# Altium PCB Clock_Led7_23.PcbDoc
Units mm, origin at the board's own origin, x right, y up, seen from the top; angles counter-clockwise.
Board outline 205.75 x 97.75 mm, 2 copper layers (Top Layer, Bottom Layer); 65 components, 51 nets, 252 pads, 68 vias.
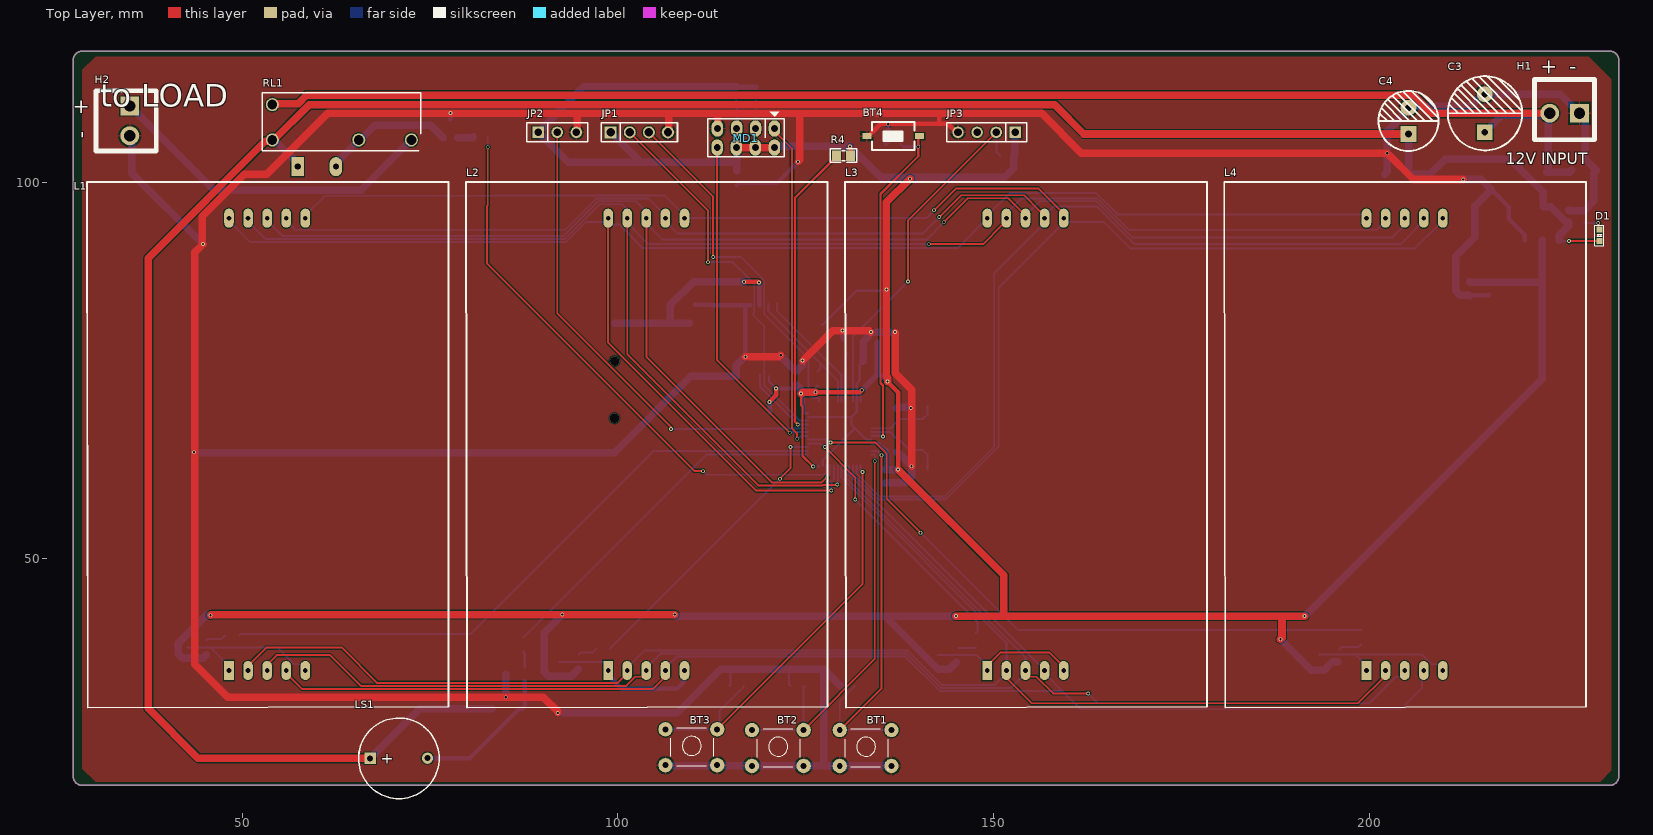
[diagram p0: Top Layer view]
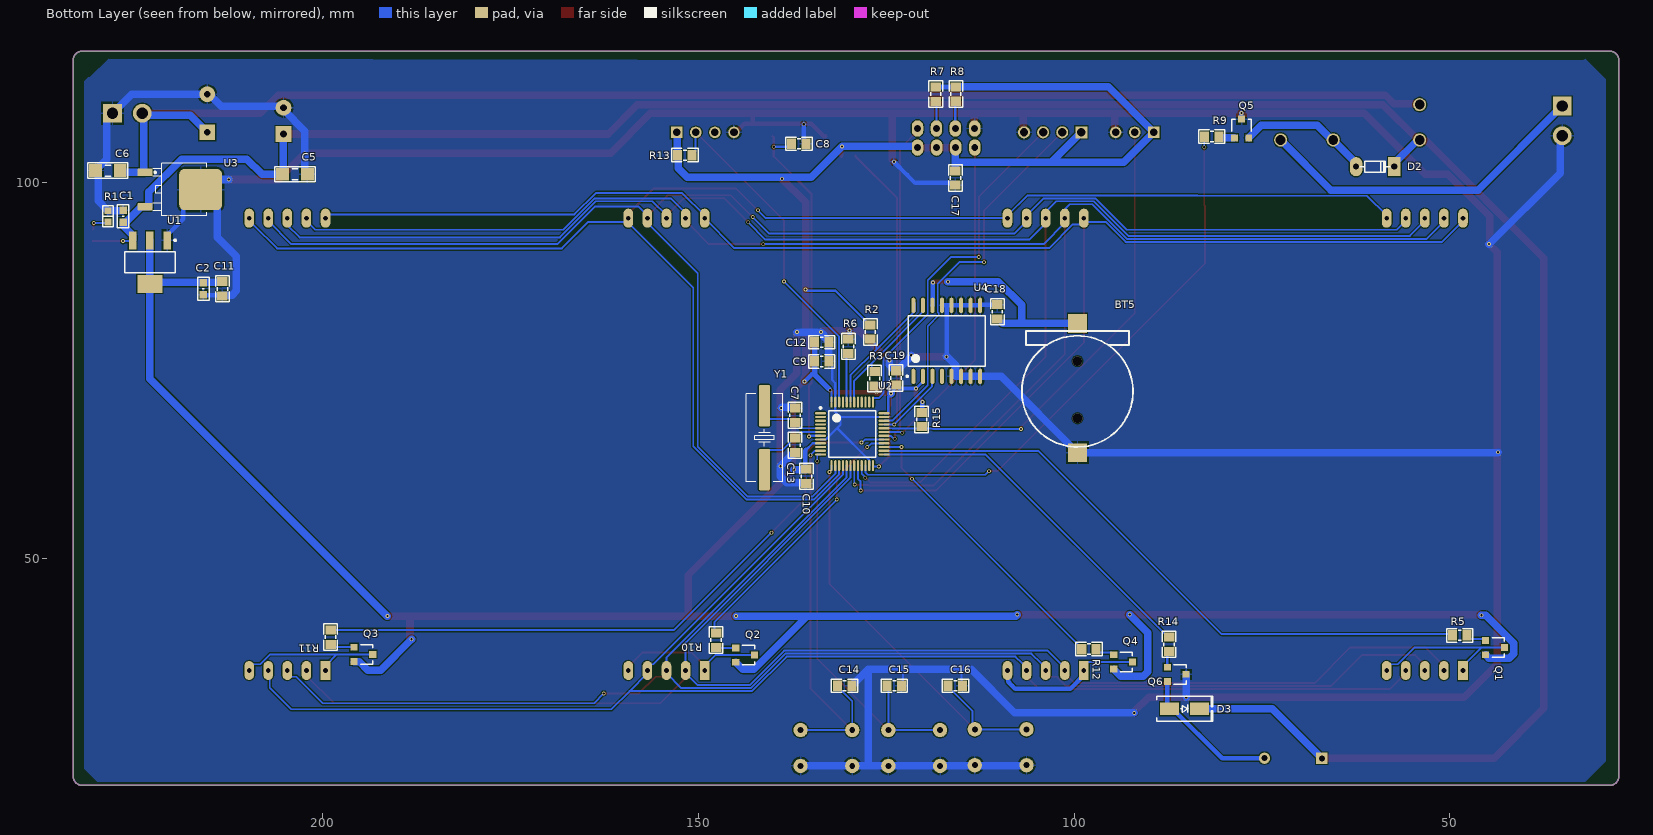
[diagram p1: Bottom Layer view, seen from below]
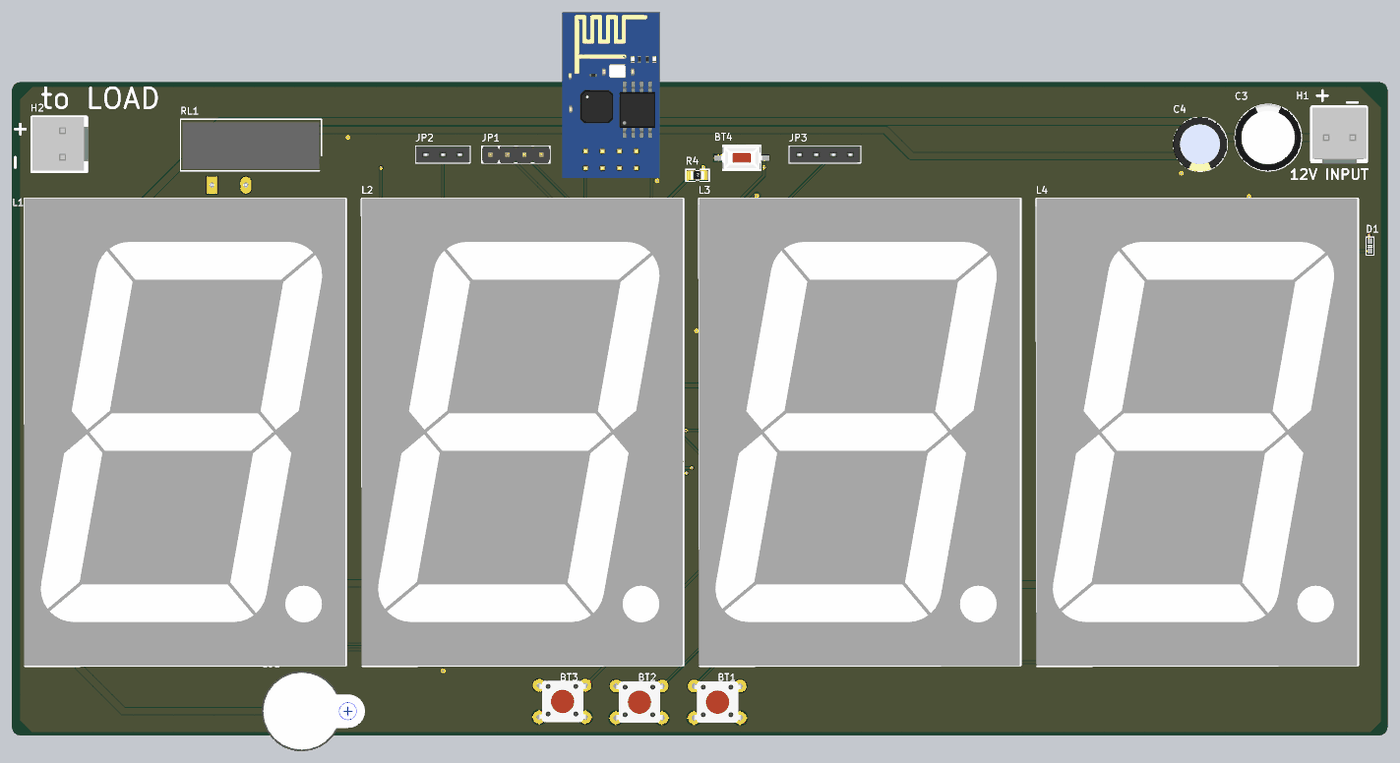
[diagram p2: 3D render of the assembled board from above, using the file's embedded part models]
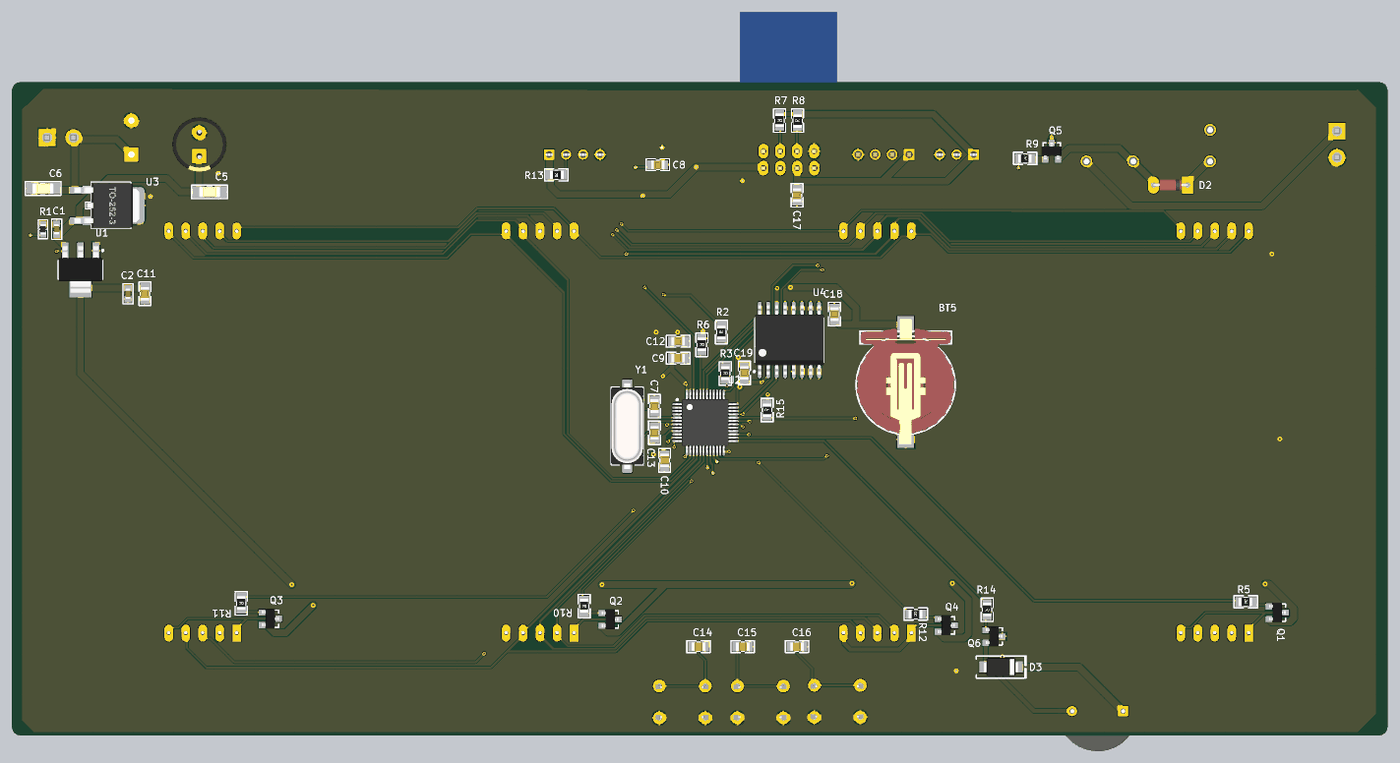
[diagram p3: 3D render of the assembled board from below, using the file's embedded part models]

## Layer stack, top to bottom
Top Solder: solder mask 0.0102, Solder Resist, Dk 3.5
Top Layer: signal copper 0.0356
Dielectric 1: dielectric 0.32, FR-4, Dk 4.8
Bottom Layer: signal copper 0.0356
Bottom Solder: solder mask 0.0102, Solder Resist, Dk 3.5

## Board outline
27.5,21.02 ccw(c28.77,21.02) 28.77,19.75 231.98,19.75 ccw(c231.98,21.02) 233.25,21.02 233.25,116.23 ccw(c231.98,116.23) 231.98,117.5 28.77,117.5 ccw(c28.77,116.23) 27.5,116.23

## Design rules (kind name [scope] priority, off if disabled: settings)
Clearance [All] p1: gap=0.14 ignorepadtopadclearanceinfootprint=FALSE
PolygonConnect [All] p1: connectstyle=Relief reliefconductorwidth=0.254 reliefentries=4 polygonreliefangle="90 Angle" airgapwidth=0.254
RoutingVias [All] p1: holewidth=0.711 width=1.27 viastyle="Through Hole" minholewidth=0.3 minwidth=0.5 maxholewidth=0.9 maxwidth=1.3
SolderMaskExpansion [All] p1: expansion=0.102 istentingtop=FALSE
Width Width_1 [InNetClass('other')] p1: maxlimit=0.6 minlimit=0.254 preferedwidth=0.254
Width POWER [InNetClass('POWER')] p2: maxlimit=1 minlimit=0.3 preferedwidth=0.6
30 further rules are at their usual default settings.

## Classes and differential pairs
net class other: 3231_nINT BOOT0 BT1 BT2 BT3 BUZZ DHT11_DATA I2C1_SCL I2C1_SDA IR_DATA LED1 LED2 LED3 LED4 LEDA LEDB LEDC LEDD LEDE LEDF LEDG LEDH NetD1_1 NetD3_1 NetL1_1 NetL2_1 NetL3_1 NetL4_1 NetMD1_2 NetMD1_3 NetQ1_1 NetQ2_1 NetQ3_1 NetQ4_1 NetQ6_1 NRST OSC1 OSC2 SWCLK SWDIO SWITCH1 UART1_RX UART1_TX
net class POWER: 3.3V 5V 12V GND NetBT5_1 NetD2_1 NetH2_1 NetQ5_1
component class LED7seg: L1 L2 L4 Q1 Q2 Q3 Q4 R5 R10 R11 R12
component class "Cuong Dao_Clock_Led7_23": BT1 BT2 BT3 BT4 BT5 C1 C2 C3 C4 C5 C6 C7 C8 C9 C10 C11 C12 C13 C14 C15 C16 C17 C18 C19 D1 D2 D3 H1 H2 JP1 JP2 JP3 LS1 MD1 Q5 Q6 R1 R2 R3 R4 R6 R7 R8 R9 R13 R14 R15 RL1 U1 U3 U4 Y1

## Components (designator, comment, footprint, x,y, rotation, side; value= is the part's Value field where it differs from the comment)
BT1 "Nut Nhan 4 Chan Cam 6x6" "Nut Nhan 4 Chan Cam 6x6" 129.87,27.33 r0 top
BT2 "Nut Nhan 4 Chan Cam 6x6" "Nut Nhan 4 Chan Cam 6x6" 118.186,27.33 r0 top
BT3 "Nut Nhan 4 Chan Cam 6x6" "Nut Nhan 4 Chan Cam 6x6" 106.68,27.432 r0 top
BT4 "Nut Nhan 2 Chan SMD 3x6x2.5" "Nut Nhan 2 Chan SMD 3x6x2.5" 136.652,106.172 r0 top
BT5 "CR1220 SMD" "DE PIN CR1220" 99.568,72.644 r0 bottom
C1 "22uF/16V" C0603 226.568,95.504 r90 bottom
C2 "22uF/16V" C0603 215.9,85.852 r270 bottom
C3 "470uF" "tu hoa 10mm" 215.392,109.22 r90 top
C4 "220nF" "tu hoa 8mm" 205.232,108.204 r90 top
C5 "104" "tu 1206" 203.708,101.092 r180 bottom
C6 "104" "tu 1206" 228.6,101.6 r0 bottom
C7 "22pF" "tu 0805" 137.163,69.018 r90 bottom
C8 "104" "tu 0805" 136.652,105.156 r180 bottom
C9 "104" "tu 0805" 133.604,76.2 r180 bottom
C10 "104" "tu 0805" 135.633,60.898 r270 bottom
C11 "104" "tu 0805" 213.36,85.852 r270 bottom
C12 "104" "tu 0805" 133.604,78.74 r180 bottom
C13 "22pF" "tu 0805" 137.16,65.024 r90 bottom
C14 "104" "tu 0805" 130.556,33.02 r180 bottom
C15 "104" "tu 0805" 123.952,33.02 r180 bottom
C16 "104" "tu 0805" 115.824,33.02 r180 bottom
C17 "104" "tu 0805" 115.824,100.584 r90 bottom
C18 "104" "tu 0805" 110.236,82.804 r270 bottom
C19 "104" "tu 0805" 123.7,74 r270 bottom
D1 "19-217/R6C-P1Q2/3T" LED_19-217 230.632,92.964 r90 top
D2 "100v" "DIODE 0.5A" 59.944,102.108 r0 bottom
D3 "M7" "DIODE SMA" 85.312,29.972 r180 bottom
H1 "Header 2POS_3.96mm" VH3.96M-2 226.008,109.22 r180 top
H2 "Header 2P VH3.96 Duc Thang" VH3.96M-2 35.052,108.204 r270 top
JP1 "JP 1x4 2.54" "JP 1x4 DT" 99.06,106.68 r0 top
JP2 "JP 1x3 2.54" "JP 1x3 CT" 89.408,106.68 r0 top
JP3 "JP 1x4 2.54" "JP 1x4 CT" 152.908,106.68 r180 top
L1 "LED 7 Thanh" LED7SEG_2.3inch 52.324,61.341 r0 top
L2 "LED 7 Thanh" LED7SEG_2.3inch 102.785,61.341 r0 top
L3 "LED 7 Thanh" LED7SEG_2.3inch 153.247,61.341 r0 top
L4 "LED 7 Thanh" LED7SEG_2.3inch 203.708,61.341 r0 top
LS1 "Coi Chip Speaker" "Coi Chip Speacker" 67.056,23.368 r0 top
MD1 "ESP8266 Module" "ESP2866 Module" 120.853,107.188 r180 top
Q1 "HF" SOT23 44,38.1 r270 bottom value=C9014
Q2 "HF" SOT23 143.8,37.1 r270 bottom value=C9014
Q3 "HF" SOT23 194.6,37.2 r270 bottom value=C9014
Q4 "HF" SOT23 93.5,36.2 r270 bottom value=C9014
Q5 "HF" SOT23 77.724,107.188 r180 bottom value=C9014
Q6 "HF" SOT23 86.36,34.544 r270 bottom value=C9014
R1 "2K" RES0603 228.6,95.504 r90 bottom
R2 "4.7k" "tro smd 0805" 127.2,80.1 r90 bottom
R3 "4.7k" "tro smd 0805" 126.5,73.9 r270 bottom
R4 "10k" "tro smd 0805" 130.048,103.632 r0 top
R5 "100R" "tro smd 0805" 48.7,39.8 r180 bottom
R6 "10k" "tro smd 0805" 130,78.2 r270 bottom
R7 "10k" "tro smd 0805" 118.364,111.76 r270 bottom
R8 "10k" "tro smd 0805" 115.824,111.76 r90 bottom
R9 "100R" "tro smd 0805" 81.697,106.172 r180 bottom
R10 "100R" "tro smd 0805" 147.6,39.1 r270 bottom
R11 "100R" "tro smd 0805" 198.9,39.5 r270 bottom
R12 "100R" "tro smd 0805" 98.054,37.961 r180 bottom
R13 "4.7k" "tro smd 0805" 151.822,103.571 r0 bottom
R14 "100R" "tro smd 0805" 87.315,38.546 r270 bottom
R15 "4.7k" "tro smd 0805" 120.361,68.446 r90 bottom
RL1 "HF46F-G_003" HF46F012HS1F610 54.032,105.664 r0 top
U1 "AMS1117-3.3V" SOT223 223.012,89.408 r0 bottom value="AMS1117-3.3V SOT223"
U2 "STM32F103xx_LQFP48" STM32_LQPF48 129.54,66.548 r180 bottom
U3 "78M05 SMD TO252" TO252 219.964,99.06 r270 bottom
U4 "DS3231 SMD" "SOIC 16" 116.965,78.925 r90 bottom
Y1 "16Mhz" "Thach Anh 2 chan SMD" 141.224,66.04 r90 bottom value=4Mhz

## Footprints (in the part's own frame and the unit in brackets; to place one, negate y for a bottom-side part, rotate by r counter-clockwise, add the part's x,y. Pads: shape width x height; smd on the part's side, far side on the other; paste and mask are expansions set on the pad)
C0603 [mm]
  rect 1x1 smd: 1(-0.8,0) 2(0.8,0)
  silkscreen extent -1.52,-0.76 1.52,0.76, body extent -0.8,-0.4 0.8,0.4, height 0.87
"Coi Chip Speacker" [mm]
  rect 1.5x1.5 hole 0.8: 1(0,0)
  round 1.5 hole 0.8: 2(7.62,0.013)
  silkscreen extent -1.55,-5.38 9.18,5.36, body extent -2.22,-6 13.24,6, height 4.5
"DE PIN CR1220" [mm]
  rect 2.5x2.5 smd: 1(0,-8.6) 2(0,8.6)
  silkscreen extent -7.39,-7.6 7.4,7.84, body extent -7.39,-9.42 7.36,9.38, height 4.27
"DIODE 0.5A" [mil] "Diode muoi, xung"
  oval 65x100 hole 32: 1(100,0)
  rect 65x100 hole 32: 2(-100,0)
  silkscreen extent -80,-30 80,28, body extent -108,-33 108,32, height 61
"DIODE SMA" [mm] "SMA"
  rect 2.5x1.7 smd: 1(-2,0) 2(2,0)
  silkscreen extent -3.68,-1.65 3.75,1.65, body extent -2.6,-1.37 2.6,1.37, height 2.4
"ESP2866 Module" [mil]
  oval 60x86 hole 36: 1(0,0) 2(99,0) 3(198,0) 4(299,0) 5(0,100) 6(100,100) 7(199.5,100) 8(300,100)
  silkscreen extent -51,-86 350,149, body extent -137,-817 433,159, height 381
HF46F012HS1F610 [mm]
  round 1.75 hole 1.3: 1(0,0) 2(11.5,0) 3(18.5,0) 4(0,4.7)
  silkscreen extent -1.32,-1.42 19.76,6.3, body extent -1.05,-1.15 19.45,5.85, height 15.7
"JP 1x3 CT" [mm]
  rect 1.52x1.52 hole 1.02: 1(0,0)
  round 1.52 hole 1.02: 2(2.54,0) 3(5.08,0)
  silkscreen extent -1.52,-1.27 6.6,1.27, body extent -1.52,-1.25 6.6,1.25, height 8.51
"JP 1x4 CT" [mm]
  rect 1.52x1.52 hole 1.02: 1(0,0)
  round 1.52 hole 1.02: 2(2.54,0) 3(5.08,0) 4(7.62,0)
  silkscreen extent -1.52,-1.27 9.14,1.27, body extent -1.52,-1.25 9.14,1.25, height 8.51
"JP 1x4 DT" [mm] "4 pins, 1 row, straight, gold plating"
  rect 1.6x1.6 hole 1.1: 1(0,0)
  round 1.6 hole 1.1: 2(2.54,0) 3(5.08,0) 4(7.62,0)
  silkscreen extent -1.27,-1.27 8.89,1.27, body extent -1.27,-1.27 8.89,1.27, height 8.54
LED7SEG_2.3inch [mil] "Dán"
  rect 50x100 hole 25: 1(-160,-1035)
  oval 50x100 hole 25: 2(-60,-1035) 3(40,-1035) 4(140,-1035) 5(240,-1035) 6(240,1335.08) 7(140,1335.08) 8(40,1335.08) 9(-60,1335.08) 10(-160,1335.08)
  silkscreen extent -905,-1230 990,1525, body extent -905,-1228 985,1528, height 480
LED_19-217 [mm]
  rect 0.8x0.8 smd: 1(0.75,0) 2(-0.75,0)
  silkscreen extent -1.35,-0.6 1.35,0.6
"Nut Nhan 2 Chan SMD 3x6x2.5" [mm] "Switch SMD type"
  rect 1.2x0.8 smd: 1(-3.5,0) 2(3.5,0)
  silkscreen extent -2.82,-1.85 2.82,1.85, body extent -3.05,-1.85 3.05,1.85, height 2.5
"Nut Nhan 4 Chan Cam 6x6" [mil] "SW button 4pin, 250 x250 mil"
  round 75 hole 31: 1(-13,-8) 1(258,-8) 2(-13,-196) 2(258,-196)
  silkscreen extent 15,-215 240,0, body extent -31,-225 281,19, height 276
RES0603 [mm]
  rect 0.9x0.95 smd: 1(-0.75,0) 2(0.75,0)
  silkscreen extent -1.42,-0.71 1.42,0.71, body extent -0.78,-0.4 0.78,0.4, height 0.6
"SOIC 16" [mm] "SOIC, 16-Leads, Body 10.30x7.50mm, Pitch 1.27mm, IPC Medium Density"
  oval 2.032x0.55 smd: 1(-4.725,4.445) 2(-4.725,3.175) 3(-4.725,1.905) 4(-4.725,0.635) 5(-4.725,-0.635) 6(-4.725,-1.905) 7(-4.725,-3.175) 8(-4.725,-4.445) 9(4.725,-4.445) 10(4.725,-3.175) 11(4.725,-1.905) 12(4.725,-0.635) 13(4.725,0.635) 14(4.725,1.905) 15(4.725,3.175) 16(4.725,4.445)
  silkscreen extent -4.85,-5.15 3.35,5.4, body extent -5.15,-5.17 5.16,5.16, height 2.48
SOT23 [mm] "SOT23"
  rect 0.9x0.95 smd: 1(-0.95,-1.25) 2(0,1.25)
  rect 0.9x0.95 smd mask+0: 3(0.95,-1.25)
  silkscreen extent -1.3,-0.38 1.3,1.25, body extent -1.52,-1.23 1.48,1.27, height 1.06
SOT223 [mm]
  rect 1x2.4 smd: 1(-2.3,-2.9) 2(0,-2.9) 3(2.3,-2.9)
  rect 3.3x2.4 smd: 4(0,2.9)
  silkscreen extent -3.47,-3.02 3.35,1.4, body extent -3.25,-3.56 3.25,3.4, height 1.68
STM32_LQPF48 [mm]
  oval 1.45x0.3 smd: 1(-4.225,2.75) 2(-4.225,2.25) 3(-4.225,1.75) 4(-4.225,1.25) 5(-4.225,0.75) 6(-4.225,0.25) 7(-4.225,-0.25) 8(-4.225,-0.75) 9(-4.225,-1.25) 10(-4.225,-1.75) 11(-4.225,-2.25) 12(-4.225,-2.75) 25(4.225,-2.75) 26(4.225,-2.25) 27(4.225,-1.75) 28(4.225,-1.25) 29(4.225,-0.75) 30(4.225,-0.25) 31(4.225,0.25) 32(4.225,0.75) 33(4.225,1.25) 34(4.225,1.75) 35(4.225,2.25) 36(4.225,2.75)
  oval 0.3x1.45 smd: 13(-2.75,-4.225) 14(-2.25,-4.225) 15(-1.75,-4.225) 16(-1.25,-4.225) 17(-0.75,-4.225) 18(-0.25,-4.225) 19(0.25,-4.225) 20(0.75,-4.225) 21(1.25,-4.225) 22(1.75,-4.225) 23(2.25,-4.225) 24(2.75,-4.225) 37(2.75,4.225) 38(2.25,4.225) 39(1.75,4.225) 40(1.25,4.225) 41(0.75,4.225) 42(0.25,4.225) 43(-0.25,4.225) 44(-0.75,4.225) 45(-1.25,4.225) 46(-1.75,4.225) 47(-2.25,4.225) 48(-2.75,4.225)
  silkscreen extent -4.35,-3.1 3.1,3.57, body extent -4.5,-4.5 4.5,4.5, height 1.6
"Thach Anh 2 chan SMD" [mm] "SMD Crystal HC49/US-SM package"
  round 0.508 on Mech15: 0(0,0)
  rrect25% 5.5x1.5 smd: 1(-4.25,0) 2(4.25,0)
  silkscreen extent -5.84,-2.41 5.84,2.41, body extent -6.4,-2.41 6.4,2.42, height 4.29
TO252 [mm] "TO252"
  round 0.5 on Mech15: 0(0,0)
  rrect25% 1x2 smd: 1(-2.285,-3.7) 3(2.285,-3.7)
  rrect25% 5.5x5.7 smd: 2(0,3.7)
  silkscreen extent -3.5,-2.7 3.5,4.5, body extent -3.3,-3.95 3.3,5.76, height 2.31
"tro smd 0805" [mm]
  rect 1.2x1.4 smd: 1(-0.946,-0.061) 2(0.954,-0.061)
  silkscreen extent -1.75,-0.97 1.75,0.84, body extent -1.56,-0.76 1.44,0.64, height 0.53
"tu 0805" [mm] "Compoment SMD 80x50mil"
  rect 1.2x1.4 smd: 1(-0.946,-0.003) 2(0.954,-0.003)
  silkscreen extent -1.75,-0.89 1.75,0.89, body extent -1.01,-0.64 1.01,0.63, height 0.61
"tu 1206" [mm]
  rect 1.7x1.7 smd: 1(-1.65,0) 2(1.65,0)
  silkscreen extent -2.67,-1.02 2.67,1.02, body extent -1.57,-0.8 1.63,0.8, height 0.94
"tu hoa 8mm" [mm]
  rect 2.1x2.1 hole 0.9: 1(-1.75,0)
  round 2.1 hole 0.9: 2(1.75,0)
  silkscreen extent -4,-4 4,4, body extent -4.1,-4.07 4.1,4.13, height 13.81
"tu hoa 10mm" [mm]
  rect 2.1x2.1 hole 0.9: 1(-2.54,0)
  round 2.1 hole 0.9: 2(2.54,0)
  silkscreen extent -4.95,-4.96 4.93,4.92, body extent -5,-5 4.97,5, height 20.01
VH3.96M-2 [mm]
  rect 2.5x2.5 hole 1.5: 1(-1.98,0)
  round 2.5 hole 1.5: 2(1.98,0)
  silkscreen extent -4,-4.5 4,3.54, body extent -4.08,-4.49 3.96,3.88, height 10.26

## Part data
BT1 BT2 BT3: "Nut Nhan 4 Chan 6x6mm", Ma_Hang=MH004584, Ten="Nút Nhấn 4 Chân 6x6x5MM DIP"
BT5: library part "De pin CR1220 SMD", Ma_Hang=MH000833, Ten="Đế PIN CR1220 SMD"
C1 C2: library part C0603, "Multilayer Ceramic Capacitors MLCC, SMD/SMT 22uF, 16V, 10%, 0603"
C3: library part "Tu Hoa 470uF 35V 10x15", "Cắm", Chung_Loai=Cắm, Don_Vi=Con, Ma_Hang=MH002204, So_Chan=2, Ten_Linh_Kien="Tụ Hóa 470uF 35V 10x15MM"
C4: library part "Tu Hoa 220uF 35V 8x12", "Cắm", Chung_Loai=Cắm, Don_Vi=Con, Ma_Hang=MH006553, So_Chan=2, Ten_Linh_Kien="Tụ Hóa 220uF 35V 8x12MM"
C5 C6: library part "Tu 1206 104 50V 20%", "Dán", Chung_Loai=Dán, Don_Vi=Con, Ma_Hang=MH004544, So_Chan=2, Ten_Linh_Kien="Tụ 1206 104-0.1uF 20% 50V"
C7 C13: library part "Tu 0805 22pF 50V 10%", "Dán", Chung_Loai=Dán, Don_Vi=Con, Ma_Hang=MH004560, So_Chan=2, Ten_Linh_Kien="Tụ 0805 22P 10% 50V"
C8 C9 C10 C11 C12 C14 C15 C16 C17 C18 C19: library part "Tu 0805 104 50V 10%", "Dán", Chung_Loai=Dán, Don_Vi=Con, Ma_Hang=MH004551, So_Chan=2, Ten_Linh_Kien="Tụ 0805 104-100nF 10% 50V"
D1: library part "LED 19-217", "LED", Part Number=19-217/R6C-P1Q2/, Height=0.9mm
D2: library part "Diode 1N4148", "Cắm", Chung_Loai=Cắm, Don_Vi=Con, Ma_Hang=MH001065, Ten_Linh_Kien="Diode 1N4148 DO35 450mA 100V ( 1N4148 DIP)"
D3: library part "Diode M7 ( 4007 )", "Dán", Chung_Loai=Dán, Don_Vi=Con, Ma_Hang=MH000944, Ten_Linh_Kien="Diode M7 1N4007 SMD 1A 1000V"
H1: library part "Header 2P VH3.96 Duc Thang", "Cắm", Chung_Loai=Cắm, Don_Vi=Con, Ma_Hang=MH001283, Ten_Linh_Kien="Header 2P XH2.54-2P Đực Thẳng"
H2: "Cắm", Chung_Loai=Cắm, Don_Vi=Con, Ma_Hang=MH001283, Ten_Linh_Kien="Header 2P XH2.54-2P Đực Thẳng"
JP1: library part "JP 1x4 2.54 Duc Thang", "Cắm", Chung_Loai=Cắm, Don_Vi=Con, Ma_Hang=MH000903, Ten_Linh_Kien="Jump Đơn Đực 2.54MM 1x40P Thẳng 11MM"
JP2: library part "JP 1x3 2.54 Cai Thang", "Cắm", Chung_Loai=Cắm, Don_Vi=Con, Ma_Hang=MH004006, Ten_Linh_Kien="Jump Đơn Cái 2.54MM 1x20P Thẳng"
JP3: library part "JP 1x4 2.54 Cai Thang", "Cắm", Chung_Loai=Cắm, Don_Vi=Con, Ma_Hang=MH004006, Ten_Linh_Kien="Jump Đơn Cái 2.54MM 1x20P Thẳng"
L1 L2 L3 L4: library part "LED 7x1 2.3inch Anot", "Dán", Chung_Loai=Dán, Don_Vi=Con, Ma_Hang=MH000901, Ten_Linh_Kien="Led 7 2.3 1 Số Anot (Sáng Đỏ)"
LS1: "Còi chip"
Q1 Q2 Q3 Q4 Q5 Q6: library part "C1815 HF SMD", "NPN transistor"
R1: library part R0603, "Chip Resistor - Surface Mount 2KΩ ±1% 1/16W 0603 RoHS"
R2 R3 R13 R15: library part "Tro 0805 5% 4.7k", "Dán", Chung_Loai=Dán, Don_Vi=Con, Ma_Hang=MH005307, So_Chan=2, Ten_Linh_Kien="Trở 0805 5% 4.7k"
R4 R6 R7 R8: library part "Tro 0805 5% 10k", "Dán", Chung_Loai=Dán, Don_Vi=Con, Ma_Hang=MH005239, So_Chan=2, Ten_Linh_Kien="Trở 0805 5% 10k"
R5 R9 R10 R11 R12 R14: library part "Tro 0805 5% 100R", "Dán", Chung_Loai=Dán, Don_Vi=Con, Ma_Hang=MH005251, So_Chan=2, Ten_Linh_Kien="Trở 0805 5% 100R"
RL1: library part Relay_HF46F, "HF46F-G_003-HS1F_610_", MFR=Hongfa, Part Number=HF46F-G/003-HS1F(610), Datasheet Link=https://docs.rs-online.com/fb0b/0900766b81663fd2.pdf, Height=15.3mm
U1: library part "AMS1117 SMD", "SMD LDO regulator", MFR="Advanced Monolithic System", Chung_Loai=Dán, Ma_Hang=MH000596, Part Number=AMS1117-3.3V
U3: "Dán", Chung_Loai=Dán, Don_Vi=Con, Ma_Hang=MH001917, Ten_Linh_Kien="78M05 TO252"
U4: "SOIC"
Y1: library part "Thach Anh 2 chan SMD", "Crystal For all Crystal 2pin."
BT4: Ma_Hang=MH001036, Ten="Nút Nhấn 2 Chân 3x6x2.5MM SMD"
U2: ComponentLink1Description="Manufacturer Link", ComponentLink1URL=www.st.com/stm32, ComponentLink2Description=Datasheet, ComponentLink2URL=http://www.st.com/stonline/products/literature/ds/13587.pdf, DatasheetVersion="rev6, Mar-2008", PackageDescription="48-Pin Low-Profile Quad Flat Pack, 7 x 7 mm Body, 0.5 mm Pitch (LQFP48)", PackageReference=LQFP48, PackageVersion=Mar-2008, Published=30-May-2008, Publisher="Altium Limited"

## Via types
v1: diameter 0.5, hole 0.3, Top Layer to Bottom Layer, 66 vias
v2: diameter 1.27, hole 1.27, Top Layer to Bottom Layer, 2 vias

## Nets (pads, with @x,y where several pads share a name; then routed paths per layer and width w, separated by ;. In a path a pad name is that pad's centre, name@x,y a point inside that pad or via, vN(x,y) a via of type N, cw(c..) or ccw(c..) an arc to the next point about the centre after c; other vN are vias at no path point)
3.3V: C2.1 C9.1 C10.1 C11.1 C12.1 C17.2 C19.2 JP1.1 JP2.1 JP3.1 MD1.5 MD1.6 MD1.7 Q1.3 Q2.3 Q3.3 Q4.3 R2.2 R3.2 R4.2 R7.1 R8.2 R13.2 R15.2 U1.2 U1.4 U2.9 U2.24 U2.36 U2.48 U4.2 | length 510.8
  Top Layer w0.3: v1(124.393,71.907) 124.431,71.869 124.431,70.369 124.6,70.2 124.6,63.6 v1(126,62.2)
  Top Layer w0.6: v1(120.2,70.8) 121.067,71.667 v1(121.067,72.6) ; v1(126.3,72.1) 132.2,72.1 v1(132.465,72.365) ; v1(130.9,104.8) 131,104.7 131,103.574 R4.2 ; v1(135.9,73.5) 137.3,72.1 v1(137.3,61.8)
  Top Layer w1: v1(45.8,42.4) 45.9,42.5 v1(92.6,42.5) v1(107.6,42.5) ; MD1.7 MD1.6 MD1.5 ; v1(124.393,71.907) 124.586,72.1 v1(126.3,72.1) ; v1(135.9,73.5) 135.9,73.988 135.76,74.128 v1(135.76,85.744) 135.76,97.36 v1(138.9,100.5) ; v1(137.3,61.8) 151.4,47.7 151.4,42.3 ; v1(145,42.3) 151.4,42.3 ; v1(188.2,39.2) 188.401,39.401 188.401,42.3 ; v1(191.4,42.3) 188.401,42.3 ; 151.4,42.3 188.401,42.3
  Bottom Layer w0.254: U1.4@222.822,86.698 U1.4
  Bottom Layer w0.3: U4.2 120.14,73.527 v1(121.067,72.6) ; C19.2@123.258,72.6 C19.2 ; v1(124.393,71.907) 124.393,71.853 124.74,71.506 124.74,69.298 U2.36 ; v1(126,62.2) 126.79,62.2 U2.24 ; v1(126.3,72.1) 126.3,72.685 R3.2 ; R2.2 127.239,81.054 131.785,85.6 135.562,85.6 135.706,85.744 v1(135.76,85.744) ; U2.48 132.29,72.19 v1(132.465,72.365) v1@132.64,72.54 ; U2.9 134.816,65.298 135.7,64.4
  Bottom Layer w0.5: v1(121.067,72.6) C19.2@123.258,72.6
  Bottom Layer w0.6: R8.2 115.768,112.71 118.42,112.71 R7.1 ; v1(120.2,70.8) 120.2,69.5 R15.2 ; MD1.5 MD1.5@121.005,104.8 ; 134.55,74.45 134.95,74.45 v1(135.9,73.5) ; C10.1 135.636,61.99 135.79,62.144 135.79,64.31 135.7,64.4
  Bottom Layer w0.7: v1@132.64,72.54 134.55,74.45 C9.1 C12.1
  Bottom Layer w1: Q1.3 44.8,36.7 42.1,36.7 41.514,37.286 41.514,38.694 45.22,42.4 v1(45.8,42.4) ; v1(92.6,42.5) 90.2,40.1 90.2,34.9 90.8,34.3 93.8,34.3 Q4.3 ; JP1.1 103.04,102.7 ; v1(107.6,42.5) 107.8,42.3 135.7,42.3 ; R8.2 95.442,112.714 JP2.1 93.388,102.7 103.04,102.7 ; MD1.7 115.803,104.631 115.803,102.7 ; C17.2 115.803,101.556 115.803,102.7 ; MD1.5@121.005,104.8 v1(130.9,104.8) 135,100.7 151.5,100.7 152.676,101.876 152.676,103.532 R13.2 152.842,103.698 152.842,106.614 JP3.1 ; C19.2 123.803,73.046 124.34,72.509 124.34,71.96 v1(124.393,71.907) ; C10.1 135.68,61.8 v1(137.3,61.8) ; v1(145,42.3) 135.7,42.3 ; Q2.3 144.1,35.2 142.62,35.2 135.7,42.12 135.7,42.3 ; v1(188.2,39.2) 192.3,35.1 194,35.1 195.15,36.25 Q3.3 ; v1(191.4,42.3) 223.012,73.912 U1.4 U1.2 ; C11.1 213.463,86.698 U1.4@222.822,86.698 ; 103.04,102.7 115.803,102.7
5V: C1.1 C4.1 C5.1 D1.2 D2.2 D3.2 LS1.1 RL1.1 U1.3 U3.3 | length 334.5
  Top Layer w0.254: v1(226.6,92.2) 226.614,92.214 D1.2
  Top Layer w1: LS1.1 44.132,23.368 37.5,30 37.5,89.912 53.108,105.52 54.091,105.52 58.911,110.34 158.16,110.34 162.046,106.454 C4.1
  Bottom Layer w0.254: U1.3 225.42,92.2 v1(226.6,92.2)
  Bottom Layer w1: RL1.1 54.176,105.52 54.436,105.52 57.404,102.552 D2.2 ; LS1.1 73.66,29.972 D3.2 ; C4.1 205.295,106.391 205.295,101.155 C5.1 208.092,101.092 210.1,103.1 218.8,103.1 223.164,98.736 223.164,96.775 224.164,96.775 226.235,94.704 C1.1 226.568,94.264 225.312,93.008 U1.3
12V: C3.1 C6.1 H1.2 RL1.4 U3.1 | length 192.3
  Top Layer w1: RL1.4 54.176,110.508 57.466,110.508 58.603,111.644 205.932,111.644 208.356,109.22 H1.2
  Bottom Layer w1: C3.1 217.645,108.933 223.741,108.933 H1.2@223.846,109.038 ; U3.1 U3.1@223.846,101.345 ; H1.2 H1.2@223.846,109.038 ; C6.1 226.695,101.345 U3.1@223.846,101.345 ; U3.1@223.846,101.345 H1.2@223.846,109.038
3231_nINT: R4.1 U2.33 U4.3 | length 48.3
  Top Layer w0.3: v1(123.956,67.8) 123.603,68.154 123.603,97.972 129.102,103.471 R4.1
  Bottom Layer w0.254: U4.3@118.927,74.459 118.927,72.875 123.957,67.844 v1(123.956,67.8) 125.314,67.799 U2.33
BOOT0: R6.2 U2.44 | length 6.6
  Bottom Layer w0.254: U2.44 130.29,76.975 R6.2@130.561,77.246
BT1: BT1.1 C14.1 U2.11 | length 54
  Top Layer w0.254: BT1.1@129.54,27.127 135.1,32.687 v1(135.1,63.7)
  Bottom Layer w0.254: C14.1 131.502,32.917 129.54,30.955 129.54,27.127 BT1.1@136.423,27.127 ; U2.11 133.774,64.289 134.511,64.289 v1(135.1,63.7)
BT2: BT2.1 C15.1 U2.12 | length 53.9
  Top Layer w0.254: BT2.1@124.739,27.127 134.2,36.588 v1(134.2,62.9)
  Bottom Layer w0.254: BT2.1@117.856,27.127 124.739,27.127 124.739,32.858 C15.1 ; U2.12 134.179,63.798 134.2,63.777 v1(134.2,62.9)
BT3: BT3.1 C16.1 U2.13 | length 57.4
  Top Layer w0.254: BT3.1@113.233,27.229 132.582,46.578 v1(132.582,61.468)
  Bottom Layer w0.254: BT3.1@106.35,27.229 113.233,27.229 113.549,27.545 113.549,29.696 116.77,32.917 C16.1 ; U2.13 132.29,61.76 v1(132.582,61.468)
BUZZ: R14.1 U2.25 | length 48
  Bottom Layer w0.254: R14.1 87.476,39.492 111.782,63.798 U2.25
DHT11_DATA: JP3.2 R13.1 U2.46 | length 47.2
  Top Layer w0.254: v1(138.615,86.815) 138.615,94.927 JP3.2
  Bottom Layer w0.254: U2.46 131.29,79.49 v1(138.615,86.815) ; JP3.2 150.403,106.645 150.403,104.105 R13.1 R13.1@150.876,103.532
GND: BT1.2 BT2.2 BT3.2 BT4.1 BT5.2 C1.2 C2.2 C3.2 C4.2 C5.2 C6.2 C7.2 C8.2 C9.2 C10.2 C11.2 C12.2 C13.1 C14.2 C15.2 C16.2 C17.1 C18.1 C19.1 H1.1 H2.2 JP1.4 JP2.3 JP3.4 MD1.4 Q5.2 Q6.2 R1.2 R6.1 U1.1 U2.8 U2.23 U2.35 U2.47 U3.2 U4.5 U4.6 U4.7 U4.8 U4.9 U4.10 U4.11 U4.12 U4.13 | length 700.9
  Top Layer w0.6: BT4.1 133.352,106.172 134.98,107.8 142.8,107.8 ; 142.8,109.2 142.8,107.8 ; JP3.4 145.039,106.68 143.919,107.8 142.8,107.8
  Top Layer w1: v1@44.7,91.8 44.7,95.5 50.3,101.1 53.3,101.1 61.4,109.2 94.7,109.2 ; v1(44.8,91.8) 43.7,90.7 43.7,35.9 48.1,31.5 v1(85.1,31.5) 90.1,31.5 92,29.6 v1(92,29.4) ; JP2.3 94.587,106.779 94.587,109.087 94.7,109.2 ; JP1.4 106.795,106.795 106.795,109.095 106.9,109.2 ; MD1.4 113.3,107.229 113.3,109.2 ; v1(117,76.8) 121.5,76.8 v1(121.7,77) ; v1(124,102.75) 124.25,103 124.25,109.2 ; v1(124.6,76.3) 128.6,80.3 v1(129.9,80.3) 133.495,80.3 v1(133.695,80.1) ; v1(136.9,80.1) 136.9,74.6 139.1,72.4 v1(139.1,62.235) ; v1(212.534,100.4) 205.9,100.4 v1(202.408,103.892) 202.4,103.9 161.7,103.9 156.4,109.2 142.8,109.2 124.25,109.2 ; 94.7,109.2 106.9,109.2 ; 106.9,109.2 113.3,109.2 ; 113.3,109.2 124.25,109.2
  Bottom Layer w0.3: C16.2 115,33.147 115,35.2 ; 122.8,35.2 122.8,33.214 C15.2 ; U2.35 131.098,68.798 ; U2.23 127.29,63.02 131.453,67.183 131.683,67.183 ; C9.2 132.2,75.747 132.2,73.702 131.79,73.292 U2.47 131.79,69.49 131.098,68.798 ; U2.8 133.068,65.798 131.683,67.183 ; 131.098,68.798 131.098,67.768 131.683,67.183
  Bottom Layer w0.6: Q5.2 77.75,108.464 v1(77.75,109.25) ; C18.1 110.289,83.7 112.495,83.7 112.52,83.675 U4.9 U4.10 U4.11 U4.12 116.965,83.65 ; C17.1 116.121,99.938 121.188,99.938 122.25,101 v1(124,102.75) ; v1(117,76.8) 116.965,76.835 116.965,83.65 ; U4.13 116.965,83.65 ; v1(129.9,80.3) 129.9,79.306 R6.1 ; C8.2 135.998,105.453 135.998,107.748 v1(136,107.75) ; C11.2 213.441,84.975 215.823,84.975 C2.2 ; U3.2 218.575,96.749 218.575,95.145 220.712,93.008 U1.1
  Bottom Layer w1: H2.2 35.339,105.937 35.339,101.261 v1(44.8,91.8) ; v1(43.6,64.1) 43.656,64.044 BT5.2 109.724,74.2 U4.8 U4.7 U4.6 115.794,74.2 115.794,75.694 116.9,76.8 v1(117,76.8) ; v1(85.1,31.5) 85.11,31.51 Q6.2 ; v1(92,29.4) 107.9,29.4 113.7,35.2 115,35.2 122.8,35.2 127.418,35.2 ; BT3.2@106.35,22.454 106.401,22.403 127.3,22.403 ; v1(121.7,77) 121.7,76.849 123.603,74.946 C19.1 123.803,74.946 124.6,75.742 v1(124.6,76.3) ; C14.2 129.602,33.117 129.502,33.217 129.402,33.217 127.418,35.2 ; C9.2 C12.2 132.65,78.837 133.31,79.497 133.31,79.714 v1(133.695,80.1) v1(136.9,80.1) ; C10.2 135.736,60.044 138.244,60.044 139.1,60.9 v1(139.1,62.235) 137.257,64.078 C13.1 ; BT1.2@136.423,22.352 136.373,22.403 127.3,22.403 ; C7.2 137.26,70.072 138.928,70.072 v1(139,70) ; C5.2 202.408,101.442 v1(202.408,103.892) 202.408,106.832 205.232,109.656 C4.2 205.442,110.164 213.499,110.164 215.094,111.76 C3.2 225.448,111.76 H1.1 228.738,108.47 228.738,103.112 C6.2 229.9,101.25 229.9,97.554 R1.2 226.618,96.254 C1.2 ; v1(212.534,100.4) 214.924,100.4 U3.2 214.03,96.826 214.03,92.73 211.5,90.2 211.5,85.583 212.086,84.998 213.263,84.998 C11.2 ; 127.3,22.403 127.418,22.521 127.418,35.2
I2C1_SCL: R2.1 U2.43 U4.16 | length 18.5
  Bottom Layer w0.254: U4.16@121.2,83.963 121.2,82.9 121.301,82.799 126.35,77.75 ; R2.1 127.039,79.154 126.566,78.681 126.566,78.581 126.35,78.365 126.35,77.75 ; U2.43 129.781,70.782 129.781,74.319 126.35,77.75
I2C1_SDA: R3.1 U2.42 U4.15 | length 18.2
  Bottom Layer w0.254: U4.15@120.003,83.856 120.066,83.794 120.066,82.835 126.95,75.95 ; R3.1 126.95,75.235 126.95,75.95 ; U2.42 129.29,73.61 126.95,75.95
IR_DATA: JP2.2 R15.1 U2.32 | length 63.7
  Top Layer w0.254: JP2.2 91.948,82.572 107.105,67.415 107.105,67.205 v1(107.1,67.2)
  Bottom Layer w0.254: v1(107.1,67.2) 118.827,67.2 118.911,67.283 124.17,67.283 124.176,67.289 124.99,67.289 U2.32@125.001,67.3
LED1: R5.1 U2.26 | length 85.8
  Bottom Layer w0.254: R5.1 49.806,39.9 80.4,39.9 104.783,64.283 123.214,64.283 123.22,64.289 125.306,64.289 U2.26
LED2: R12.1 U2.27 | length 39.2
  Top Layer w0.254: v1(121.603,60.586) 121.603,60.653 123,62.05 v1(123,64.8)
  Bottom Layer w0.254: R12.1 99,38 121.586,60.586 v1(121.603,60.586) ; v1(123,64.8) 125.313,64.8 U2.27
LED3: R10.1 U2.28 | length 35.7
  Top Layer w0.254: v1(127.533,64.8) 131.6,60.733 v1(131.6,57.8)
  Bottom Layer w0.254: U2.28 125.324,65.289 126.978,65.289 127.467,64.8 v1(127.533,64.8) ; v1(131.6,57.8) 147.9,41.5 147.9,40.285 R10.1
LED4: R11.1 U2.29 | length 87.7
  Top Layer w0.254: v1(128.3,65.4) 134.3,65.4 135.8,63.9 135.8,57.9 v1(140.3,53.4)
  Bottom Layer w0.254: U2.29 127.835,65.798 128.233,65.4 v1(128.3,65.4) ; v1(140.3,53.4) 153.254,40.446 R11.1
LEDA: L1.7 L2.7 L3.7 L4.7 U2.14 | length 221.1
  Top Layer w0.254: v1(142.8,95.4) 145.7,98.3 154.1,98.3 156.193,96.207 156.208,96.207 156.803,95.612 L3.7
  Bottom Layer w0.254: L1.7 55.88,94.892 56.482,94.29 57.057,93.715 93.015,93.715 97.194,97.894 104.059,97.894 106.341,95.612 L2.7 106.341,94.859 108,93.2 140.6,93.2 v1(142.8,95.4) ; U2.14 131.799,62.314 131.799,61.241 134.846,58.194 143.437,58.194 150.1,64.857 150.1,87.914 156.803,94.617 L3.7 156.803,95.612 157.98,96.789 163.811,96.789 168.8,91.8 204.172,91.8 207.264,94.892 L4.7
LEDB: L1.6 L2.6 L3.6 L4.6 U2.15 | length 220.3
  Top Layer w0.254: v1(142.1,96.3) 145,99.2 156,99.2 159.343,95.857 L3.6
  Bottom Layer w0.254: L1.6 58.42,95.612 61.041,98.233 83.596,98.233 83.651,98.288 106.205,98.288 108.881,95.612 L2.6 141.052,95.252 v1(142.1,96.3) ; U2.15 131.299,62.314 131.299,61.184 134.683,57.8 143.6,57.8 150.7,64.9 150.7,85.974 159.343,94.617 L3.6@159.343,95.213 ; L3.6 L3.6@159.343,95.213 ; L4.6 209.804,94.892 209.226,94.314 209.178,94.314 206.082,91.218 168.182,91.218 164.656,94.744 159.812,94.744 L3.6@159.343,95.213
LEDC: L1.4 L2.4 L3.4 L4.4 U2.16 | length 205
  Top Layer w0.254: L1.4@55.88,35.78 55.88,34.692 56.482,34.09 57.972,32.6 104.7,32.6 106.341,34.241 L2.4 106.341,35.412 L2.4@105.872,35.881
  Bottom Layer w0.254: L2.4 106.341,35.412 106.943,36.014 107.841,36.912 138.288,36.912 142.888,32.312 159.183,32.312 ; U2.16 130.799,62.314 130.799,61.127 156.044,35.881 156.333,35.881 156.803,35.412 156.803,34.692 159.183,32.312 ; L4.4 207.07,34.858 207.07,32.77 204.2,29.9 161.595,29.9 159.183,32.312
LEDD: L1.3 L2.3 L3.3 L4.3 U2.17 | length 200.9
  Top Layer w0.254: L1.3 53.34,35.84 54.6,37.1 61.706,37.1 65.812,32.994 101.114,32.994 102.343,34.223 103.332,34.223 103.801,34.692 L2.3 ; L3.3 154.263,34.692 154.732,34.223 155.721,34.223 157.944,32 v1(162.6,32)
  Bottom Layer w0.254: L2.3 103.801,35.412 104.403,36.014 105.695,37.306 138.451,37.306 143.051,32.706 152.277,32.706 154.263,34.692 154.263,36.795 130.299,60.758 130.299,62.314 U2.17 ; v1(162.6,32) 163.9,30.7 200,30.7 203.523,34.223 204.255,34.223 204.724,34.692 L4.3
LEDE: L1.2 L2.2 L3.2 L4.2 U2.18 | length 201
  Top Layer w0.254: L1.2 50.8,35.687 53.213,38.1 63.3,38.1 68.012,33.388 99.957,33.388 101.261,34.692 L2.2 ; L3.2 151.723,34.142 152.017,33.847 152.017,33.783 155.1,30.7 198.5,30.7 202.184,34.384 L4.2
  Bottom Layer w0.254: L2.2 101.261,35.412 103.549,37.7 138.614,37.7 143.214,33.1 150.131,33.1 151.723,34.692 L3.2 151.723,38.777 129.799,60.701 129.799,62.314 U2.18
LEDF: L1.9 L2.9 L3.9 L4.9 U2.19 | length 220.2
  Top Layer w0.254: L2.9 101.261,77.139 118.725,59.675 127.266,59.675 127.344,59.753 129.153,59.753 v1(129.2,59.8) ; v1(141.4,91.794) 148.625,91.794 151.121,94.29 151.723,94.892 L3.9 ; L4.9 L4.9@202.184,95.887
  Bottom Layer w0.254: L1.9 50.8,94.8 53.106,92.494 92.994,92.494 97.6,97.1 100.6,97.1 101.073,96.627 101.073,95.441 L2.9 101.261,94.617 104.084,91.794 v1(141.4,91.794) ; v1(129.2,59.8) 129.2,59.867 129.281,59.948 129.281,62.314 U2.19 ; L3.9 151.723,95.887 153.73,97.894 163.82,97.894 167.999,93.715 201.007,93.715 202.184,94.892 L4.9
LEDG: L1.10 L2.10 L3.10 L4.10 U2.20 | length 219.3
  Top Layer w0.254: L2.10 98.721,78.679 118.4,59 v1(128.4,59) ; L3.10@149.183,94.892 L3.10 ; L4.10@199.644,94.892 L4.10
  Bottom Layer w0.254: L1.10 48.26,94.892 51.052,92.1 93.157,92.1 95.801,94.744 98.252,94.744 L2.10@98.721,95.213 ; L2.10 L2.10@98.721,95.213 ; v1(128.4,59) 128.447,59.047 128.447,60.253 128.781,60.587 128.781,62.314 U2.20 ; L4.10 199.644,95.256 199.4,95.5 199.4,95.535 199.175,95.76 166.512,95.76 163.672,98.6 152.171,98.6 149.183,95.612 L3.10 149.183,95.213 145.246,91.277 103.326,91.277 100.18,94.423 99.191,94.423 98.721,94.892 L2.10@98.721,95.213
LEDH: L1.8 L2.8 L3.8 L4.8 U2.21 | length 217.2
  Top Layer w0.254: L2.8 103.801,76.799 120.531,60.069 127.103,60.069 127.733,60.7 v1(127.8,60.7) ; v1(143.4,94.7) 146.606,97.906 151.969,97.906 153.661,96.214 154.263,95.612 L3.8
  Bottom Layer w0.254: L1.8 53.34,94.892 55.332,92.9 92.8,92.9 97.4,97.5 102.4,97.5 103.801,96.099 L2.8 103.801,94.599 106,92.4 141.1,92.4 v1(143.4,94.7) ; v1(127.8,60.7) 127.8,60.767 128.281,61.248 128.281,62.314 U2.21 ; L3.8 154.263,95.612 156.151,97.5 163.657,97.5 168.451,92.706 203.088,92.706 204.724,94.342 L4.8
NetBT5_1: BT5.1 C18.2 U4.14 | length 28.8
  Top Layer w0.6: v1(116.8,86.8) 118.7,86.8 v1(118.8,86.7)
  Bottom Layer w0.6: 109.534,81.244 C18.2@109.69,81.4 ; v1(118.8,86.7) 118.845,86.655 118.845,83.675 U4.14
  Bottom Layer w1: BT5.1 107,81.244 ; 109.534,81.244 107,81.244 ; v1(116.8,86.8) 110.1,86.8 107,83.7 107,81.244
NetD1_1: D1.1 R1.1 | length 2.9
  Top Layer w0.254: v1(230.5,94.6) 230.5,93.846 D1.1
  Bottom Layer w0.254: R1.1 228.754,94.6 v1(230.5,94.6)
NetD2_1: D2.1 Q5.3 RL1.2 | length 17.6
  Bottom Layer w1: D2.1 62.484,102.584 65.532,105.632 RL1.2 65.735,105.664 67.671,107.6 75.112,107.6 Q5.3
NetD3_1: D3.1 LS1.2 Q6.3 | length 19.1
  Bottom Layer w0.6: LS1.2 80.321,23.381 86.912,29.972 D3.1 87.61,30.27 Q6.3
NetH2_1: H2.1 RL1.3 | length 44.9
  Bottom Layer w1: H2.1 46.236,99 65.868,99 RL1.3
NetL1_1: L1.1 L1.5 Q1.2 | length 21.2
  Bottom Layer w0.254: Q1.2 45.847,38.1 ; L1.1 48.26,35.687 45.847,38.1 ; L1.5 58.42,35.412 57.951,35.881 56.961,35.881 54.743,38.1 45.847,38.1
NetL2_1: L2.1 L2.5 Q4.2 | length 20.7
  Bottom Layer w0.254: Q4.2 98.208,36.2 98.721,35.687 L2.1
  Bottom Layer w0.6: L2.1 98.721,34.417 100.538,32.6 107.849,32.6 108.273,33.024 108.788,33.539 108.788,34.959 L2.5
NetL3_1: L3.1 L3.5 Q2.2 | length 20.7
  Top Layer w0.254: L3.1 149.183,35.687 150.952,37.456 157.417,37.456 159.343,35.531 L3.5
  Bottom Layer w0.254: Q2.2 147.77,37.1 149.183,35.687 L3.1
NetL4_1: L4.1 L4.5 Q3.2 | length 20.3
  Bottom Layer w0.254: Q3.2 198.131,37.2 ; L4.1 199.644,35.687 198.131,37.2 ; L4.5 209.804,35.412 209.335,35.881 208.345,35.881 207.027,37.2 198.131,37.2
NetMD1_2: MD1.2 R7.2 | length 3.7
  Bottom Layer w0.3: MD1.2 118.339,110.719 R7.2
NetMD1_3: MD1.3 R8.1 | length 3.7
  Bottom Layer w0.3: R8.1 115.824,110.754 MD1.3
NetQ1_1: Q1.1 R5.2 | length 2.8
  Bottom Layer w0.254: Q1.1 45.466,39.266 47.273,39.266 R5.2
NetQ2_1: Q2.1 R10.2 | length 2.4
  Bottom Layer w0.254: Q2.1@145.35,38.05 147.565,38.05 R10.2
NetQ3_1: Q3.1 R11.2 | length 3.2
  Bottom Layer w0.254: Q3.1@196.022,37.866 196.345,38.189 198.604,38.189 R11.2
NetQ4_1: Q4.1 R12.2 | length 2.7
  Bottom Layer w0.254: Q4.1 95.027,37.427 96.627,37.427 R12.2
NetQ5_1: Q5.1 R9.2 | length 2.2
  Bottom Layer w1: Q5.1 80.643,105.938 80.743,106.038 R9.2
NetQ6_1: Q6.1 R14.2 | length 2.2
  Bottom Layer w0.3: R14.2 87.61,37.358 Q6.1
NRST: BT4.2 C8.1 U2.7 | length 46.4
  Top Layer w0.3: v1(135.3,66.2) 135.3,72.983 134.97,73.313 134.97,98.47 140,103.5 v1(140,104.76) 140,106.02 BT4.2
  Bottom Layer w0.3: U2.7 135.202,66.298 v1(135.3,66.2) ; C8.1 137.99,104.76 v1(140,104.76)
OSC1: C7.1 U2.5 Y1.2 | length 9.4
  Bottom Layer w0.254: U2.5 136.386,67.298 136.587,67.499 136.587,67.599 137.06,68.072 C7.1 137.633,68.545 140.606,68.545 141.224,69.163 Y1.2
OSC2: C13.2 U2.6 Y1.1 | length 10.7
  Bottom Layer w0.254: U2.6 133.774,66.789 136.246,66.789 137.057,65.978 C13.2 137.257,65.978 138.859,64.376 140.606,64.376 141.224,63.757 Y1.1
SWCLK: JP1.3 U2.37 | length 47.9
  Top Layer w0.254: JP1.3 112.7,98.12 v1(112.7,90.1)
  Bottom Layer w0.254: v1(112.7,90.1) 116.4,90.1 119.5,87 119.5,82.485 125.367,76.618 125.367,72.018 125.533,71.852 125.533,71.782 125.982,71.333 126.769,71.333 126.79,71.312 U2.37
SWDIO: JP1.2 U2.34 | length 50.9
  Top Layer w0.254: JP1.2 112,96.28 v1(112,89.4)
  Bottom Layer w0.254: v1(112,89.4) 115.285,89.4 117.567,87.118 118.167,86.518 118.167,82.709 118.034,82.576 118.034,82.366 119.5,80.9 119.5,73 124.193,68.307 125.306,68.307 U2.34
SWITCH1: R9.1 U2.22 | length 74.8
  Top Layer w0.254: v1(82.7,104.7) 82.7,96.967 82.6,96.867 82.6,89.2 110.182,61.618 111.282,61.618 v1(111.329,61.571)
  Bottom Layer w0.254: R9.1 82.7,106.054 v1(82.7,104.7) ; v1(111.329,61.571) 111.396,61.571 111.863,61.103 121.817,61.103 121.82,61.1 127.469,61.1 127.79,61.421 U2.22
UART1_RX: MD1.8 U2.31 | length 44.4
  Top Layer w0.254: MD1.8 113.233,76.367 v1(122.9,66.7)
  Bottom Layer w0.254: v1(122.9,66.7) 122.967,66.7 123.056,66.789 125.306,66.789 U2.31
UART1_TX: MD1.1 U2.30 | length 44.1
  Top Layer w0.254: MD1.1 120.853,106.858 123.186,104.525 123.186,67.314 123.853,66.647 123.853,65.947 v1(123.9,65.9)
  Bottom Layer w0.254: v1(123.9,65.9) 124,65.9 124.389,66.289 125.306,66.289 U2.30
pads on no net: JP3.3 U2.1 U2.2 U2.3 U2.4 U2.10 U2.38 U2.39 U2.40 U2.41 U2.45 U3.0 U4.1 U4.4 Y1.0
copper on no net:
  other v2: 99.568,68.618 99.573,76.223

## Polygon pours and split planes (outlines as drawn)
GND on Top Layer "GND" (solid, remove dead copper, pour order 0): 232.25,113.75 232.25,21.75 230.75,20.25 30.5,20.25 28.75,22 28.75,115 30.5,116.75 229.25,116.75
GND on Bottom Layer "GND" (solid, remove dead copper, pour order 1): 228.5,116.5 231,114 231.25,114 231.75,113.5 231.75,22 230,20.25 32,20.25 29.25,23 29.25,113.75 32,116.5 32.25,116.25 123,116.25

## Keep-outs
Keep-Out Layer:
  lines w0.17: 27.5,21.02 ccw(c28.77,21.02) 28.77,19.75 231.98,19.75 ccw(c231.98,21.02) 233.25,21.02 233.25,116.23 ccw(c231.98,116.23) 231.98,117.5 224.25,117.5 28.77,117.5 ccw(c28.77,116.23) 27.5,116.23 27.5,21.02

## Silkscreen, mask and mechanical layers (free items; w line width, h text height)
Top Overlay:
  text "-" at 226.649,114.493 h2
  text "+" at 224.764,114.227 h2 r90
  text "to LOAD" at 31.102,110.063 h3
  text "+" at 27.477,109.236 h2
  text "-" at 27.993,106.851 h2 r270
  text "12V INPUT" at 218.203,102.46 h1.5

## Text inside footprints (layer, text, board x,y; h text height)
LS1: Top Overlay "+" at 68.466,22.657 h1.52